# EAGLE board ADCModule (EAGLE 6.6.0)
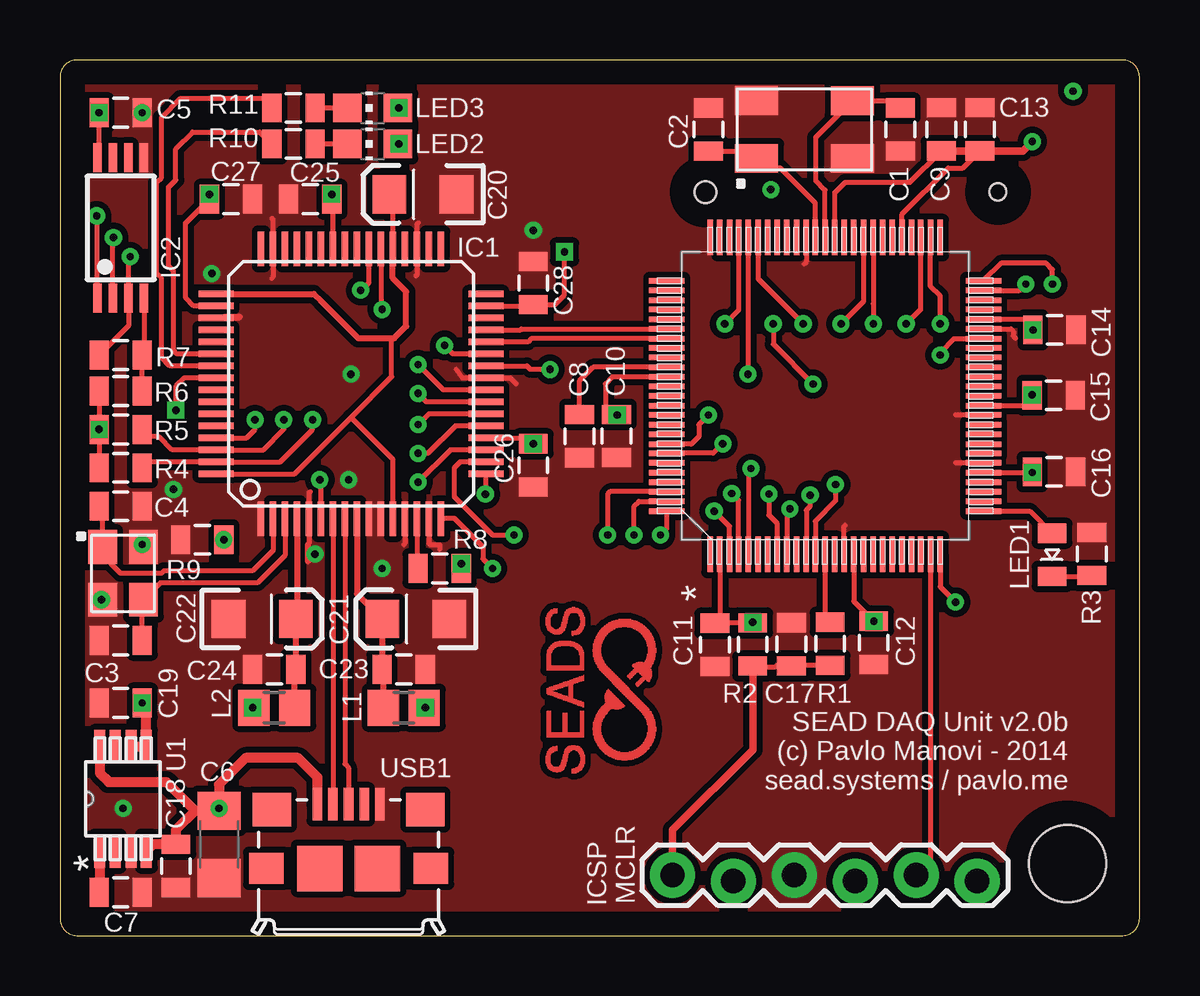
[diagram p0: board, top side]
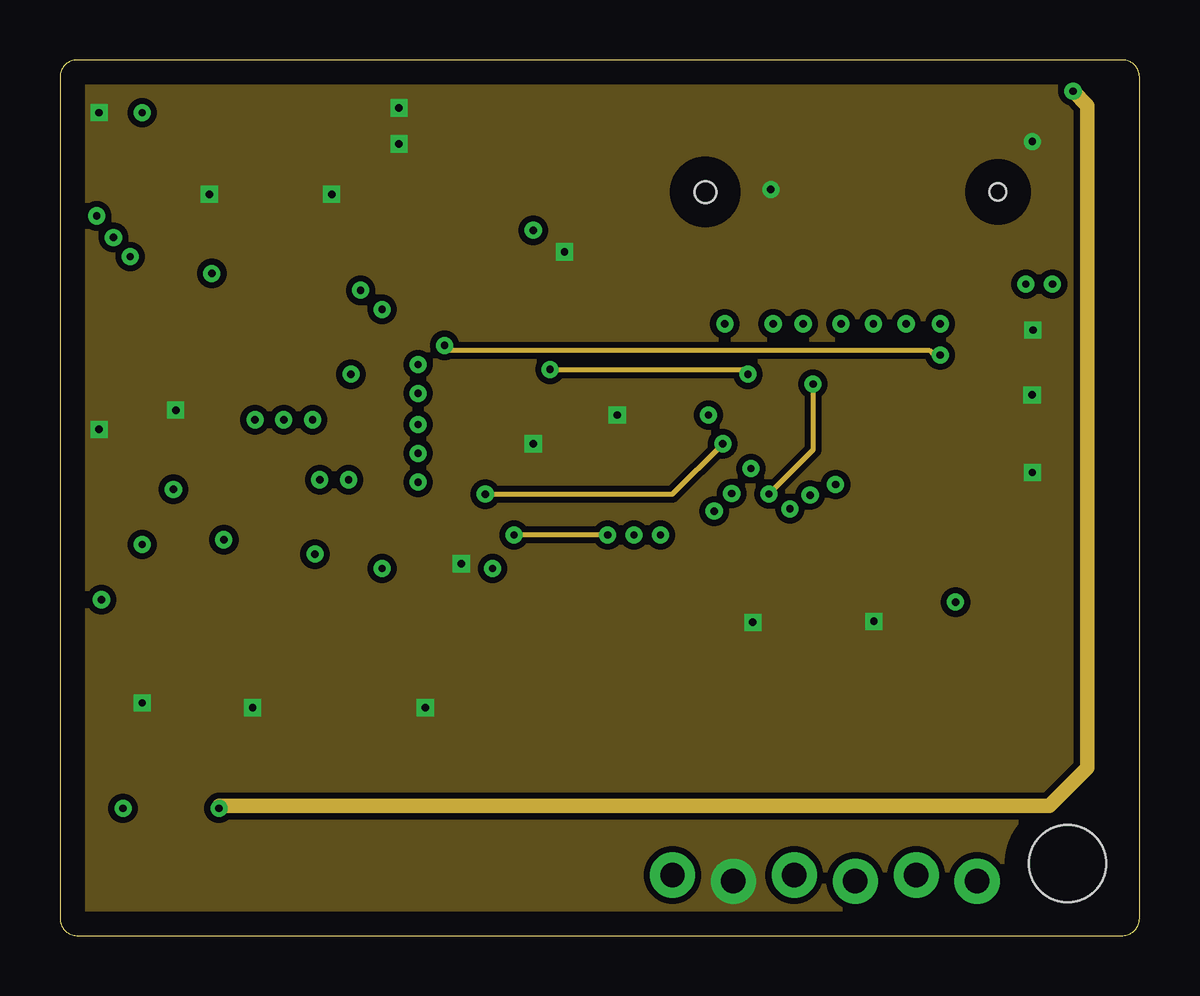
[diagram p1: board, inner layer Route14]
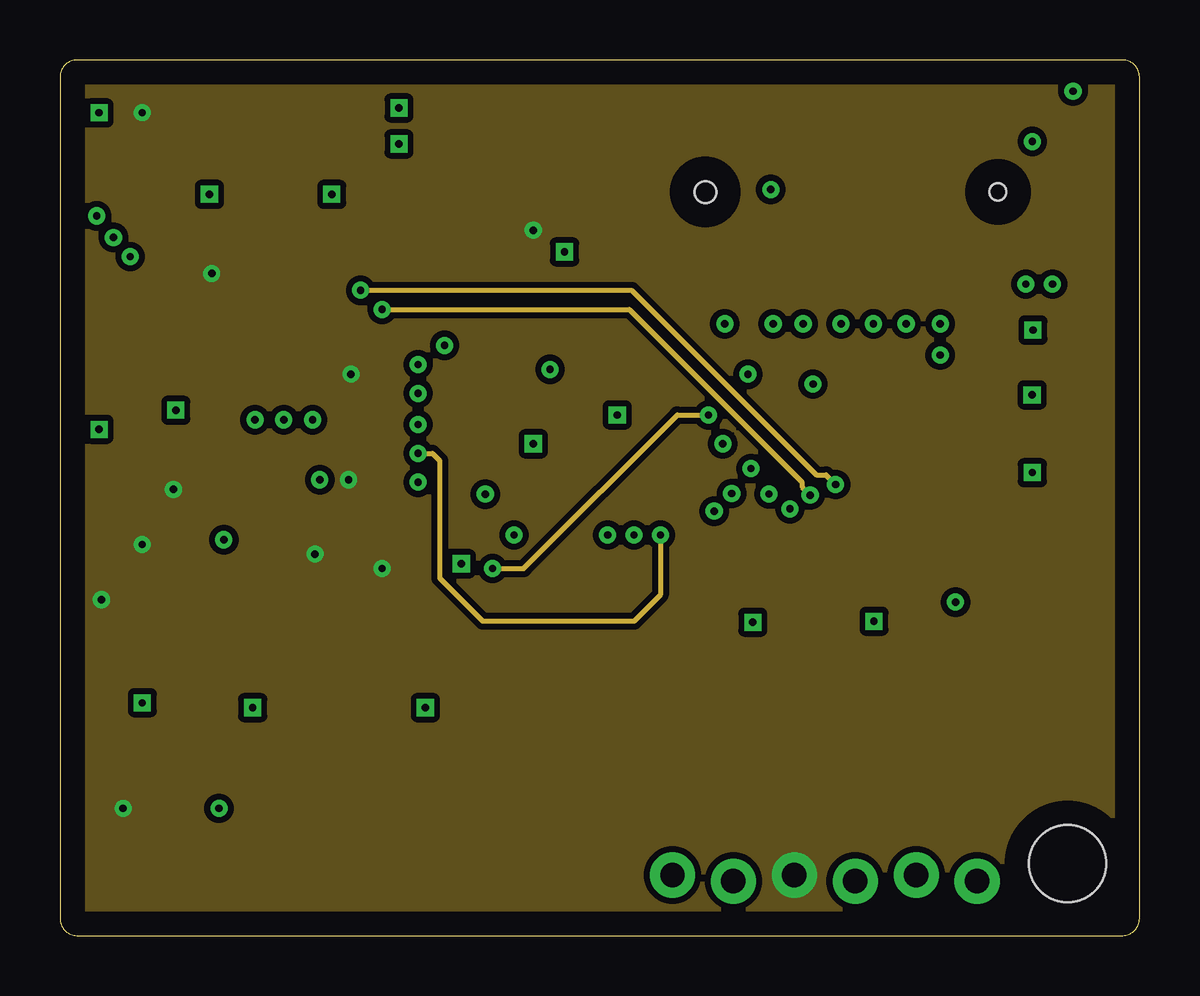
[diagram p2: board, inner layer Route15]
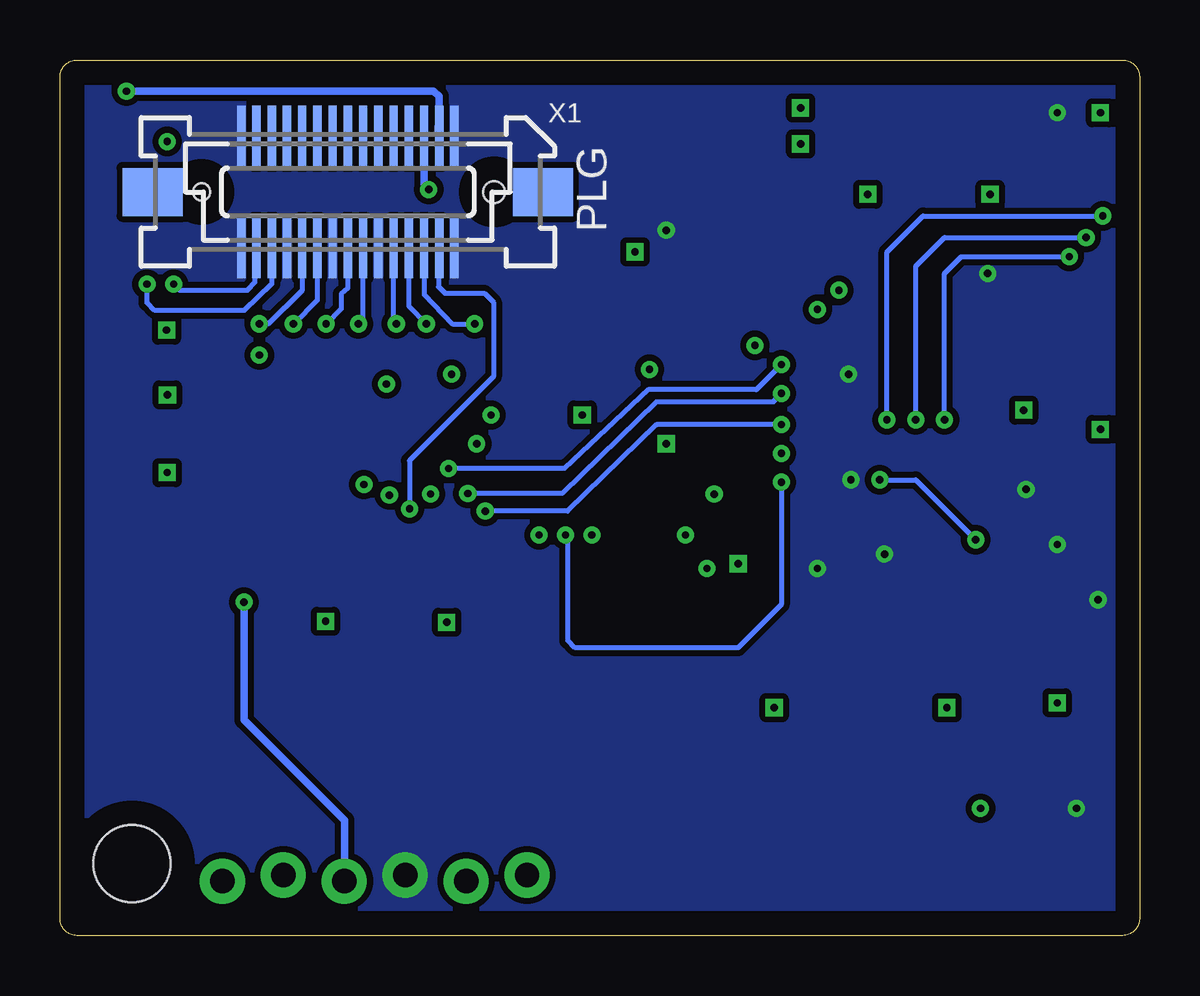
[diagram p3: board, bottom side, seen from below]

Size 45 x 36.5 mm. Coordinates in mm from the lower left corner, seen from the top.
Outline: 0.71,0 44.29,0 arc90 45,0.71 45,35.79 arc90 44.29,36.5 0.71,36.5 arc90 0,35.79 0,0.71 arc90 0.71,0
Copper layers (1*14+15*16): Top 0.035mm / dielectric 1.5mm / Route14 0.035mm / dielectric 0.15mm / Route15 0.035mm / dielectric 0.2mm / Bottom 0.035mm
Design rules "default *": minimum track width 10mil, minimum drill 24mil, track to track 8mil, track to pad 8mil, pad to pad 8mil, via to via 8mil, smd to smd 8mil, copper to edge 40mil, drill to drill 8mil, minimum pad ring 10mil, minimum via ring 8mil, stop-mask expansion 4mil, vias tented up to drill 0mil, thermal gap 10mil
Holes 3.2 mm at 42,3

## Footprints (pad centres in the part's own frame; a part is rotated, then mirrored left to right if it is on the bottom)
0805 = smd 0.8 x 1.2: 1 -0.9,0; 2 0.9,0
1206 = smd 1.6 x 1.8: 1 -1.4,0; 2 1.4,0
EIA3216 = smd 1.4 x 1.6: A 1.4,0; C -1.4,0
LQFP64 = smd 1.45 x 0.27: 1 -5.625,3.75; 2 -5.625,3.25; 3 -5.625,2.75; 4 -5.625,2.25; 5 -5.625,1.75; 6 -5.625,1.25; 7 -5.625,0.75; 8 -5.625,0.25; 9 -5.625,-0.25; 10 -5.625,-0.75; 11 -5.625,-1.25; 12 -5.625,-1.75; 13 -5.625,-2.25; 14 -5.625,-2.75; 15 -5.625,-3.25; 16 -5.625,-3.75; 33 5.625,-3.75; 34 5.625,-3.25; 35 5.625,-2.75; 36 5.625,-2.25; 37 5.625,-1.75; 38 5.625,-1.25; 39 5.625,-0.75; 40 5.625,-0.25; 41 5.625,0.25; 42 5.625,0.75; 43 5.625,1.25; 44 5.625,1.75; 45 5.625,2.25; 46 5.625,2.75; 47 5.625,3.25; 48 5.625,3.75 | smd 0.27 x 1.45: 17 -3.75,-5.625; 18 -3.25,-5.625; 19 -2.75,-5.625; 20 -2.25,-5.625; 21 -1.75,-5.625; 22 -1.25,-5.625; 23 -0.75,-5.625; 24 -0.25,-5.625; 25 0.25,-5.625; 26 0.75,-5.625; 27 1.25,-5.625; 28 1.75,-5.625; 29 2.25,-5.625; 30 2.75,-5.625; 31 3.25,-5.625; 32 3.75,-5.625; 49 3.75,5.625; 50 3.25,5.625; 51 2.75,5.625; 52 2.25,5.625; 53 1.75,5.625; 54 1.25,5.625; 55 0.75,5.625; 56 0.25,5.625; 57 -0.25,5.625; 58 -0.75,5.625; 59 -1.25,5.625; 60 -1.75,5.625; 61 -2.25,5.625; 62 -2.75,5.625; 63 -3.25,5.625; 64 -3.75,5.625
TSSOP8 = smd 0.35 x 1.2: 1 -0.975,-2.925; 2 -0.325,-2.925; 3 0.325,-2.925; 4 0.975,-2.925; 5 0.975,2.925; 6 0.325,2.925; 7 -0.325,2.925; 8 -0.975,2.925
1X06-SIP_LOCK = drill 1.016 pad 1.88: 1 0,0; 2 2.54,-0.254; 3 5.08,0; 4 7.62,-0.254; 5 10.16,0; 6 12.7,-0.254
FB805 = smd 1.3 x 1.5: 1 -0.85,0; 2 0.85,0
LED-0805 = smd 0.8 x 1.2: 1 -0.9,0; 2 0.9,0
CHIP-LED0805 = smd 1.2 x 1.2: A 0,-1.05; C 0,1.05
MUA08A = smd 1.372 x 0.457: 1 -2.184,0.965; 2 -2.184,0.33; 3 -2.184,-0.33; 4 -2.184,-0.965; 5 2.184,-0.965; 6 2.184,-0.33; 7 2.184,0.33; 8 2.184,0.965
TQFP100_12X12MC = smd 1.473 x 0.229: 1 -6.604,4.801; 2 -6.604,4.394; 3 -6.604,3.988; 4 -6.604,3.607; 5 -6.604,3.2; 6 -6.604,2.794; 7 -6.604,2.388; 8 -6.604,2.007; 9 -6.604,1.6; 10 -6.604,1.194; 11 -6.604,0.787; 12 -6.604,0.406; 13 -6.604,0; 14 -6.604,-0.406; 15 -6.604,-0.787; 16 -6.604,-1.194; 17 -6.604,-1.6; 18 -6.604,-2.007; 19 -6.604,-2.388; 20 -6.604,-2.794; 21 -6.604,-3.2; 22 -6.604,-3.607; 23 -6.604,-3.988; 24 -6.604,-4.394; 25 -6.604,-4.801; 51 6.604,-4.801; 52 6.604,-4.394; 53 6.604,-3.988; 54 6.604,-3.607; 55 6.604,-3.2; 56 6.604,-2.794; 57 6.604,-2.388; 58 6.604,-2.007; 59 6.604,-1.6; 60 6.604,-1.194; 61 6.604,-0.787; 62 6.604,-0.406; 63 6.604,0; 64 6.604,0.406; 65 6.604,0.787; 66 6.604,1.194; 67 6.604,1.6; 68 6.604,2.007; 69 6.604,2.388; 70 6.604,2.794; 71 6.604,3.2; 72 6.604,3.607; 73 6.604,3.988; 74 6.604,4.394; 75 6.604,4.801 | smd 0.229 x 1.473: 26 -4.801,-6.604; 27 -4.394,-6.604; 28 -3.988,-6.604; 29 -3.607,-6.604; 30 -3.2,-6.604; 31 -2.794,-6.604; 32 -2.388,-6.604; 33 -2.007,-6.604; 34 -1.6,-6.604; 35 -1.194,-6.604; 36 -0.787,-6.604; 37 -0.406,-6.604; 38 0,-6.604; 39 0.406,-6.604; 40 0.787,-6.604; 41 1.194,-6.604; 42 1.6,-6.604; 43 2.007,-6.604; 44 2.388,-6.604; 45 2.794,-6.604; 46 3.2,-6.604; 47 3.607,-6.604; 48 3.988,-6.604; 49 4.394,-6.604; 50 4.801,-6.604; 76 4.801,6.604; 77 4.394,6.604; 78 3.988,6.604; 79 3.607,6.604; 80 3.2,6.604; 81 2.794,6.604; 82 2.388,6.604; 83 2.007,6.604; 84 1.6,6.604; 85 1.194,6.604; 86 0.787,6.604; 87 0.406,6.604; 88 0,6.604; 89 -0.406,6.604; 90 -0.787,6.604; 91 -1.194,6.604; 92 -1.6,6.604; 93 -2.007,6.604; 94 -2.388,6.604; 95 -2.794,6.604; 96 -3.2,6.604; 97 -3.607,6.604; 98 -3.988,6.604; 99 -4.394,6.604; 100 -4.801,6.604
ABM3B = smd 1.8 x 1.2: 1 -2,-1.2; 2 2,-1.2; 3 2,1.2; 4 -2,1.2
7M-CRYSTAL = smd 1.4 x 1.2: 1 -1.1,-0.85; 2 1.1,-0.85; 3 1.1,0.85; 4 -1.1,0.85
CONN_USB_MICRO-B = smd 1.6 x 1.4: BODY@1 -3.2,2.45; BODY@2 3.2,2.45 | smd 1.45 x 1.3: BODY@3 3.425,0; BODY@6 -3.425,0 | smd 1.9 x 1.9: BODY@4 1.2,0; BODY@5 -1.2,0 | smd 0.4 x 1.35: P1 -1.3,2.675; P2 -0.65,2.675; P3 0,2.675; P4 0.65,2.675; P5 1.3,2.675
52885-0374 = smd 0.35 x 2.5: 1 -4.445,-2.35; 2 -4.445,2.35; 3 -3.81,-2.35; 4 -3.81,2.35; 5 -3.175,-2.35; 6 -3.175,2.35; 7 -2.54,-2.35; 8 -2.54,2.35; 9 -1.905,-2.35; 10 -1.905,2.35; 11 -1.27,-2.35; 12 -1.27,2.35; 13 -0.635,-2.35; 14 -0.635,2.35; 15 0,-2.35; 16 0,2.35; 17 0.635,-2.35; 18 0.635,2.35; 19 1.27,-2.35; 20 1.27,2.35; 21 1.905,-2.35; 22 1.905,2.35; 23 2.54,-2.35; 24 2.54,2.35; 25 3.175,-2.35; 26 3.175,2.35; 27 3.81,-2.35; 28 3.81,2.35; 29 4.445,-2.35; 30 4.445,2.35 | smd 2.5 x 2: M1 -8.137,0; M2 8.137,0 | hole 0.9: -6.098,0 | hole 0.7: 6.098,0

## Placement (x,y rotation side)
C1  20pF  [0805]  35.03,33.6 270 top
C2  20pF  [0805]  27.03,33.6 270 top
C3  20pF  [0805]  2.53,12.3 180 top
C4  20pF  [0805]  2.53,17.9 180 top
C5  .1uF  [0805]  2.53,34.3 0 top
C6  100uF  [1206]  6.63,3.8 90 top
C7  .01uF  [0805]  2.53,1.8 180 top
C8  10uF  [0805]  21.66,20.82 90 top
C9  .1uF  [0805]  36.74,33.61 270 top
C10  .1uF  [0805]  23.2,20.82 90 top
C11  .1uF  [0805]  27.3,12.12 90 top
C12  .1uF  [0805]  33.92,12.2 90 top
C13  .1uF  [0805]  38.34,33.61 270 top
C14  .1uF  [0805]  41.46,25.25 180 top
C15  .1uF  [0805]  41.42,22.52 180 top
C16  .1uF  [0805]  41.43,19.33 180 top
C17  .1uF  [0805]  30.48,12.14 90 top
C18  2.2uF  [0805]  4.83,2.9 270 top
C19  4.7uF  [0805]  2.53,9.7 0 top
C20  3.3uF  [EIA3216]  15.13,30.9 180 top
C21  4.7uF  [EIA3216]  14.83,13.2 180 top
C22  4.7uF  [EIA3216]  8.43,13.2 0 top
C23  .1uF  [0805]  14.33,11.1 0 top
C24  .1uF  [0805]  8.93,11.1 180 top
C25  .1uF  [0805]  10.43,30.7 0 top
C26  .1uF  [0805]  19.73,19.6 90 top
C27  .1uF  [0805]  7.13,30.7 180 top
C28  .1uF  [0805]  19.73,27.2 270 top
IC1  [LQFP64]  12.13,23 90 top
IC2  93-C46AST  [TSSOP8]  2.53,29.5 0 top
JP6  [1X06-SIP_LOCK]  25.53,2.52 0 top
L1  [FB805]  14.33,9.5 0 top
L2  [FB805]  8.93,9.5 180 top
LED1  [LED-0805]  41.35,15.87 270 top
LED2  [CHIP-LED0805]  13.03,33 90 top
LED3  [CHIP-LED0805]  13.03,34.5 90 top
R1  470  [0805]  32.1,12.16 90 top
R2  10k  [0805]  28.88,12.13 90 top
R3  330  [0805]  43.01,15.9 90 top
R4  10k  [0805]  2.53,19.5 180 top
R5  10k  [0805]  2.53,21.1 180 top
R6  10k  [0805]  2.53,22.7 180 top
R7  2.2k  [0805]  2.53,24.2 180 top
R8  10k  [0805]  15.83,15.3 0 top
R9  12k 1%  [0805]  5.93,16.5 180 top
R10  470  [0805]  9.73,33 180 top
R11  470  [0805]  9.73,34.5 180 top
U1  LP2989_DGK_8  [MUA08A]  2.63,5.7 90 top
U$1  PIC32MX795F512L-  [TQFP100_12X12MC]  31.89,22.5 90 top
U$2  ABM3B-8.000MHZ-10-1-U-T  [ABM3B]  31.03,33.6 0 top
U$3  7M-12.000MEEQ-T  [7M-CRYSTAL]  2.63,15.1 270 top
USB1  CON-USB-F-MICRO-B  [CONN_USB_MICRO-B]  12.03,2.8 0 top
X1  52885-0374  [52885-0374]  33,31 180 bottom

## Library data of the parts
C1-C28 IC1 R1-R11 U$1-U$3 = SensorCape
IC2 = microchip; MPN: CAT93C46YI-G; OC_FARNELL: 1718375; OC_NEWARK: 74P0100
JP6 LED1 = ASL
L1 L2 USB1 = dp_devices.v6
LED2 LED3 = led
U1 = SensorCape; BASE_PN: LP2989; COMP: TypeLDO; LIBRARY: ReferenceLP2989AIMM; PARTNUMBER: LP2989AIMM-25; PIN: Count8; SYMBOL: NameLP2989AIMM-25; TYPE: LP2989AIMM-2.5; VENDOR: NationalSemiconductor; VERSION: 1
X1 = SensorCape; MPN: 52760-0379; OC_FARNELL: unknown; OC_NEWARK: 92M6431

## Nets
A0: IC1.27 U$1.44
CANRX: U$1.87
CANTX: U$1.88
CS*: IC1.26 U$1.71
D0: IC1.16 U$1.93
D1: IC1.17 U$1.94
D2: IC1.18 U$1.98
D3: IC1.19 U$1.99
D4: IC1.21 U$1.100
D5: IC1.22 U$1.3
D6: IC1.23 U$1.4
D7: IC1.24 U$1.5
GND: C1.2 C2.1 C3.2 C4.1 C5.2 C6.1 C7.1 C8.1 C9.1 C10.1 C11.1 C12.1 C13.1 C14.1 C15.1 C16.1 C17.2 C18.2 C19.1 C20.C C21.C C22.C C23.2 C24.2 C25.1 C26.1 C27.1 C28.1 IC1.1 IC1.5 IC1.10 IC1.11 IC1.13 IC1.15 IC1.25 IC1.35 IC1.47 IC1.51 IC2.5 JP6.3 R3.2 R9.2 U1.3 U$1.15 U$1.31 U$1.36 U$1.45 U$1.65 U$1.75 U$2.2 U$2.4 U$3.2 U$3.4 USB1.P5 X1.1 X1.2 X1.12 X1.18 X1.24 X1.29 X1.30
MCLR: C17.1 JP6.1 R1.1 R2.1
MISO: U$1.9 X1.4
MOSI: U$1.72 X1.6
N$1: C1.1 U$1.63 U$2.3
N$2: C2.2 U$1.64 U$2.1
N$4: C8.2 U$1.85
N$8: C3.1 IC1.3 U$3.3
N$9: C4.2 IC1.2 U$3.1
N$10: IC1.7 USB1.P2
N$11: IC1.8 USB1.P3
N$12: IC1.63 IC2.1 R4.1
N$13: IC1.62 IC2.2 R5.1
N$14: R1.2 U$1.13
N$15: LED1.1 U$1.26
N$16: LED1.2 R3.1
N$17: IC2.4 R6.1 R7.1
N$18: IC1.61 IC2.3 R7.2
N$19: IC1.14 R8.1
N$20: IC1.6 R9.1
N$21: C22.A C24.1 IC1.4 L2.1
N$22: C21.A C23.1 IC1.9 L1.1
N$23: C7.2 U1.1
N$27: IC1.48
N$28: IC1.54 R10.2
N$29: IC1.55 R11.2
N$32: LED2.C R10.1
N$33: LED3.C R11.1
PGC: JP6.5 U$1.24
PGD: JP6.4 U$1.25
RD*: IC1.28 U$1.82
SCK: U$1.70 X1.10
SCL: U$1.58 X1.16
SDA: U$1.59 X1.14
SIWUA: IC1.30
SS: U$1.8 X1.8
U1RX: U$1.52 X1.22
U1TX: U$1.53 X1.20
U3RX: U$1.49 X1.28
U3TX: U$1.50 X1.26
USB_UART_RX: IC1.39 U$1.12
USB_UART_TX: IC1.38 U$1.11
VCC1V8_D: C20.A IC1.12 IC1.37 IC1.49 IC1.64
VDD3V3_D: C5.1 C9.2 C10.2 C11.2 C12.2 C13.2 C14.2 C15.2 C16.2 C19.2 C25.2 C26.2 C27.2 C28.2 IC1.20 IC1.31 IC1.42 IC1.50 IC1.56 IC2.8 JP6.2 L1.2 L2.2 LED2.A LED3.A R2.2 R4.2 R5.2 R6.2 R8.2 U1.5 U1.6 U$1.2 U$1.16 U$1.30 U$1.37 U$1.46 U$1.55 U$1.62 U$1.86 X1.5
VDD5V0_D: C6.2 C18.1 U1.4 U1.8 USB1.P1 X1.3
WR*: IC1.29 U$1.81

## Tracks (layer width: path | path; a pad name or v marks a point on that pad's centre or on a via)
A0  (via drill 0.3)
  Top 0.203: IC1.27 16.38,24.25 v16.03,24.6 | U$1.44 37.26,24.88 36.69,24.31 v36.69,24.2
  Route14 0.203: v16.03,24.6 16.23,24.4 36.23,24.4 36.43,24.2 v36.69,24.2
CS*  (via drill 0.3)
  Top 0.203: IC1.26 19.46,23.75 19.61,23.6 v20.43,23.6 | U$1.71 28.68,29.08 v28.68,23.4
  Route14 0.203: v20.43,23.6 28.48,23.6 v28.68,23.4
D0  (via drill 0.3)
  Top 0.203: IC1.16 15.9,17.4 16.43,17.4 17.63,16.2 17.63,15.7 v18.03,15.3 | v27.03,21.7 26.63,21.3 26.63,20.8 26.32,20.49 U$1.93
  Route15 0.203: 27.03,21.6 v27.03,21.7 25.73,21.7 19.33,15.3 v18.03,15.3
D1  (via drill 0.3)
  Top 0.203: v17.73,18.4 17.75,18.43 IC1.17 | v27.63,20.5 27.24,20.11 U$1.94
  Route14 0.203: v17.73,18.4 25.53,18.4 v27.63,20.5
D2  (via drill 0.3)
  Top 0.203: U$1.98 22.94,18.51 22.83,18.4 v22.83,16.7 | IC1.18 16.68,19.75 16.43,19.5 16.43,18.3 18.03,16.7 v18.93,16.7
  Route14 0.203: v22.83,16.7 v18.93,16.7
D3  (via drill 0.3)
  Top 0.203: IC1.19 16.28,20.25 v14.93,18.9 | v23.93,16.7 23.93,17.9 24.13,18.1 U$1.99
  Bottom 0.203: v14.93,18.9 14.93,13.8 16.73,12 23.53,12 23.83,12.3 23.83,16.6 v23.93,16.7
D4  (via drill 0.3)
  Top 0.203: IC1.21 16.48,21.25 15.33,20.1 v14.93,20.1 | U$1.100 25.29,16.96 v25.03,16.7
  Route15 0.203: v25.03,16.7 25.03,14.2 23.93,13.1 17.63,13.1 15.83,14.9 15.83,19.8 15.53,20.1 v14.93,20.1
D5  (via drill 0.3)
  Top 0.203: IC1.22 15.38,21.75 v14.93,21.3 | U$1.3 27.91,17.05 v27.27,17.69
  Bottom 0.203: v27.27,17.69 23.84,17.69 20.13,21.3 v14.93,21.3
D6  (via drill 0.3)
  Top 0.203: IC1.23 15.28,22.25 v14.93,22.6 | U$1.4 28.29,18.14 v28,18.43
  Bottom 0.203: v28,18.43 24.06,18.43 20.14,22.25 15.28,22.25 v14.93,22.6
D7  (via drill 0.3)
  Top 0.203: IC1.24 15.98,22.75 v14.93,23.8 | v28.8,19.47 28.7,19.46 U$1.5
  Bottom 0.203: v28.8,19.47 23.96,19.47 20.47,22.76 15.97,22.76 v14.93,23.8
GND  (via drill 0.3)
  Top 0.203: 14.93,29.7 14.88,29.65 IC1.35 14.88,27.55 14.83,27.5 | 8.83,29.9 8.88,29.85 IC1.47 8.88,27.45 8.83,27.4 | 10.43,18.5 10.38,18.45 IC1.5 10.38,16.35 10.33,16.3 | IC1.15 15.38,16.35 15.43,16.3 15.83,16.3 15.83,16.1 | 16.53,23.6 16.78,23.25 IC1.25 18.78,23.25 19.03,23 | IC1.51 7.48,25.75 7.53,25.8 6.83,25.8 | U$1.65 31.11,28.08 31.03,28 | U$1.15 32.68,17.05 32.73,17.1 | U$1.31 37.33,19.7 | U$1.36 37.34,21.71 37.33,21.7 | U$1.45 39.64,25.29 39.73,25.2 39.73,25 39.83,24.9 | IC1.13 14.38,16.35 14.33,16.3
  Top 0.254: 10.33,16.3 10.33,15.6 v10.63,15.9
  other vias: 3.43,34.3 12.03,19 13.43,15.3 4.73,18.6 2.63,5.3 12.13,23.4 3.43,16.3 1.73,14 6.33,27.6 19.73,29.4
  pour Top (isolate 0.254, rank 3, no thermals): -1.47,0.1 -1.47,36.9 45.07,36.8 45.07,0
  pour Bottom (isolate 0.254, no thermals): 44.95,0 44.95,36.8 -1.47,36.8 -1.47,0
  pour Route15 (isolate 0.254, no thermals): 44.95,0 44.95,36.8 -1.47,36.8 -1.47,0
MCLR
  Top 0.203: R1.1 30.51,11.26 C17.1 30.43,11.3 29.93,11.3 29.83,11.2 29.13,11.2 | R2.1 29.09,11.23 29.13,11.2 | 29.13,11.2 28.93,11.2
  Top 0.305: R2.1 28.88,7.75 25.53,4.4 JP6.1
MISO  (via drill 0.3)
  Top 0.203: U$1.9 30.3,17.66 v30.43,17.79
  Bottom 0.203: X1.4 29.22,27.05 28.95,26.78 27.31,26.78 26.93,26.4 26.93,23.3 30.43,19.8 v30.43,17.79
MOSI  (via drill 0.3)
  Top 0.203: U$1.72 28.29,26.08 v27.71,25.5
  Bottom 0.203: X1.6 29.81,28.61 29.81,26.71 28.64,25.5 v27.71,25.5
N$1
  Top 0.203: U$1.63 31.89,31.07 31.51,31.46 31.51,33.28 U$2.3 34.73,34.8 C1.1
N$2
  Top 0.203: U$1.64 31.49,30.54 30.03,32 29.43,32 U$2.1 28.73,32.7 C2.2
N$4
  Top 0.203: U$1.85 22.22,23.69 21.66,23.13 C8.2
N$8
  Top 0.203: C3.1 3.43,13.95 U$3.3 4.18,14.7 8.23,14.7 9.38,15.85 IC1.3
N$9
  Top 0.203: IC1.2 8.88,16.05 8.03,15.2 4.33,15.2 4.23,15.1 2.53,15.1 2.13,15.5 2.13,15.85 U$3.1 1.78,17.75 C4.2
N$10
  Top 0.203: IC1.7 USB1.P2
N$11
  Top 0.203: IC1.8 11.88,7.15 12.03,7 USB1.P3
N$12  (via drill 0.3)
  Top 0.203: 1.43,29.9 v1.53,30 1.55,29.98 IC2.1 | R4.1 3.68,19.75 IC1.63 9.18,19.75 10.53,21.1 v10.53,21.5
  Bottom 0.203: v10.53,21.5 10.53,28.5 9.03,30 v1.53,30
N$13  (via drill 0.3)
  Top 0.203: IC2.2 2.21,29.07 v2.23,29.1 | R5.1 3.73,20.8 4.13,20.8 4.68,20.25 IC1.62 8.48,20.25 9.33,21.1 v9.33,21.5
  Bottom 0.203: v9.33,21.5 9.33,27.9 8.13,29.1 v2.23,29.1
N$14
  Top 0.203: U$1.13 31.89,13.27 R1.2
N$15
  Top 0.203: U$1.26 40.43,17.69 LED1.1
N$16
  Top 0.203: LED1.2 42.98,14.97 R3.1
N$17
  Top 0.203: 3.4,24.23 R7.1 | R6.1 R7.1 | IC2.4 3.5,24.27 R7.1
N$18  (via drill 0.3)
  Top 0.203: IC1.61 7.78,20.75 8.13,21.1 v8.13,21.5 | v2.93,28.3 2.85,28.23 IC2.3 2.85,25.43 R7.2
  Bottom 0.203: v8.13,21.5 8.13,27.6 7.43,28.3 v2.93,28.3
N$19
  Top 0.203: IC1.14 14.88,15.45 R8.1
N$20  (via drill 0.3)
  Top 0.203: IC1.6 10.88,18.95 v10.83,19
  Bottom 0.203: v10.83,19 9.33,19 R9.1
  other vias: 6.83,16.5
N$21
  Top 0.254: IC1.4 9.88,13.25 C22.A C24.1 9.78,11.15 L2.1
N$22
  Top 0.254: IC1.9 12.38,14.25 C21.A C23.1 13.48,11.05 L1.1
N$23
  Top 0.406: U1.1 1.67,1.83 C7.2
N$25
  Top 0.025: 24.58,7.83 24.58,9.38
N$28
  Top 0.203: IC1.54 4.88,24.25 4.73,24.4 4.73,27.7 4.53,27.9 4.53,31.2 4.83,31.5 4.83,32.8 5.53,33.5 8.33,33.5 R10.2 8.43,33.4
N$29
  Top 0.203: IC1.55 4.58,23.75 4.23,24.1 4.23,27.4 4.03,27.6 4.03,31.4 4.23,31.6 4.23,34.1 5.03,34.9 8.43,34.9 R11.2
N$32
  Top 0.203: LED2.C R10.1
N$33
  Top 0.203: LED3.C R11.1
PGC
  Top 0.203: U$1.24 36.29,3.12 JP6.5
PGD  (via drill 0.3)
  Top 0.203: U$1.25 36.7,14.53 v37.33,13.9
  Bottom 0.305: v37.33,13.9 37.33,9 33.13,4.8 33.13,2.29 JP6.4
RD*
  Top 0.203: U$1.82 19.63,24.88 19.5,24.75 IC1.28
SCK  (via drill 0.3)
  Top 0.203: U$1.70 29.1,27.38 v30.98,25.5
  Bottom 0.203: X1.10 31.09,25.62 v30.98,25.5
SCL  (via drill 0.3)
  Top 0.203: U$1.58 33.9,26.34 v33.91,25.5
  Bottom 0.203: X1.16 33,27 33.28,26.75 33.28,26.13 v33.91,25.5
SDA  (via drill 0.3)
  Top 0.203: U$1.59 33.49,26.43 v32.56,25.5
  Bottom 0.203: X1.14 32.37,25.66 v32.56,25.5
SS  (via drill 0.3)
  Top 0.203: v29.55,18.41 29.55,17.53 29.88,17.2 U$1.8 | v29.73,25.5 29.73,24.65 v31.39,22.99
  Route14 0.203: v31.39,22.99 31.39,20.25 v29.55,18.41
  Bottom 0.203: X1.8 30.46,26.24 v29.73,25.5
U1RX  (via drill 0.3)
  Top 0.203: v36.69,25.5 36.69,26.66 36.29,27.06 U$1.52
  Bottom 0.203: X1.22 34.91,26.89 36.32,25.5 v36.69,25.5
U1TX  (via drill 0.3)
  Top 0.203: U$1.53 35.88,26.11 v35.27,25.5
  Bottom 0.203: X1.20 34.28,26.48 v35.27,25.5
U3RX  (via drill 0.3)
  Top 0.203: U$1.49 39.99,26.89 v40.26,27.16
  Bottom 0.203: v40.26,27.16 v40.26,27.15 40.01,26.9 37.18,26.9 36.87,27.23 36.86,28.63 X1.28
U3TX  (via drill 0.3)
  Top 0.203: U$1.50 39.23,28.03 41.11,28.03 41.37,27.77 v41.37,27.16
  Bottom 0.203: X1.26 36.17,27.16 37.32,26.06 41.05,26.06 41.37,26.38 v41.37,27.16
USB_UART_RX  (via drill 0.3)
  Top 0.203: v12.53,26.9 12.57,26.9 12.88,27.21 IC1.39 | v32.33,18.8 32.33,18.13 31.48,17.28 U$1.12
  Route15 0.203: v12.53,26.9 23.83,26.9 31.53,19.2 31.93,19.2 v32.33,18.8
USB_UART_TX  (via drill 0.3)
  Top 0.203: 13.37,26.25 13.43,26.19 v13.43,26.1 13.38,26.15 IC1.38 | v31.27,18.36 31.27,17.89 31.11,17.73 U$1.11
  Route15 0.203: v13.43,26.1 23.73,26.1 30.93,18.9 30.93,18.7 v31.27,18.36
VCC1V8_D
  Top 0.203: IC1.12 13.88,19.85 12.13,21.6 | 11.03,26.3 10.88,26.45 | 12.13,25.2 11.73,25.6 | IC1.64 9.78,19.25 12.13,21.6 | 12.13,21.6 13.83,23.3 13.83,24.9 | IC1.37 13.88,30.75 C20.A
  Top 0.254: IC1.49 10.58,26.75 10.88,26.45 11.73,25.6 12.43,24.9 13.83,24.9 13.93,24.9 14.43,25.4 14.43,26.84 13.87,27.4 IC1.37
VDD3V3_D  (via drill 0.3)
  Top 0.203: U$1.86 23.01,23.28 22.73,23 22.73,21.65 C10.2 v23.23,21.7 | U$1.30 40.49,19.3 C16.2 v40.53,19.3 | U$1.37 40.49,22.09 C15.2 40.53,22.51 v40.52,22.54 | U$1.46 40.5,25.7 C14.2 40.53,25.28 v40.56,25.24 | U$1.16 33.09,13.93 C12.2 | U$1.2 27.5,13.23 C11.2 27.31,13.04 R2.2 | U$1.62 32.3,30.97 32.73,31.4 35.43,31.4 C9.2 | U$1.55 35.09,30.07 37.03,32 37.63,32 C13.2 | IC2.8 1.63,32.5 C5.1 | R6.2 R5.2 R4.2 | IC1.20 19.28,20.75 C26.2 | IC1.31 19.68,26.25 C28.2 20.63,26.3 21.03,26.7 v21.03,28.5 | IC1.50 5.58,26.25 5.23,26.6 5.23,29.7 C27.2 v6.23,30.9 | IC1.42 11.38,30.65 C25.2 v11.33,30.9 | IC1.56 5.18,23.25 4.83,22.9 v4.83,21.9 | v16.73,15.5 R8.2
  Top 0.305: v40.53,33.1 40.14,32.71 C13.2 C9.2
  Top 0.406: U1.6 U1.5 3.6,9.54 C19.2 | R2.2 v28.88,13.06 | v33.93,13.1 C12.2 | L2.2 v8.03,9.5 | v15.23,9.5 L1.2 | v14.13,33 LED2.A | LED3.A v14.13,34.5
  Bottom 0.305: X1.5 29.82,31.32 v29.63,31.1
  other vias: 3.43,9.7 19.73,20.5 1.63,34.3 1.63,21.1
  pour Route14 (isolate 0.254, no thermals): 44.95,0 44.95,36.8 -1.47,36.8 -1.47,0
VDD5V0_D  (via drill 0.3)
  Top 0.406: USB1.P1 10.73,6.6 9.93,7.4 7.73,7.4 6.63,6.3 v6.63,5.3 C6.2 5.63,5.2 | 5.63,5.2 4.83,4.4 C18.1 3.88,3.8 U1.4 | U1.8 1.67,6.76 2.03,6.4 4.43,6.4 5.63,5.2
  Route14 0.406: 6.63,5.4 v6.63,5.3
  Route14 0.61: 6.63,5.4 41.23,5.4 42.83,7 42.83,34.6 v42.23,35.2
  Bottom 0.305: v42.23,35.2 29.43,35.2 29.19,35 29.23,33.36 X1.3
WR*
  Top 0.203: IC1.29 19.19,25.25 19.23,25.29 U$1.81
(copper drawn outside any net)
  shapes: Top area x730

## Text on the board
tNames: SEAD DAQ Unit v2.0b / (c) Pavlo Manovi - 2014 / sead.systems / pavlo.me | ICSP | MCLR